# EAGLE board Flight Controller Auxiliary Board (EAGLE 8.6.0)
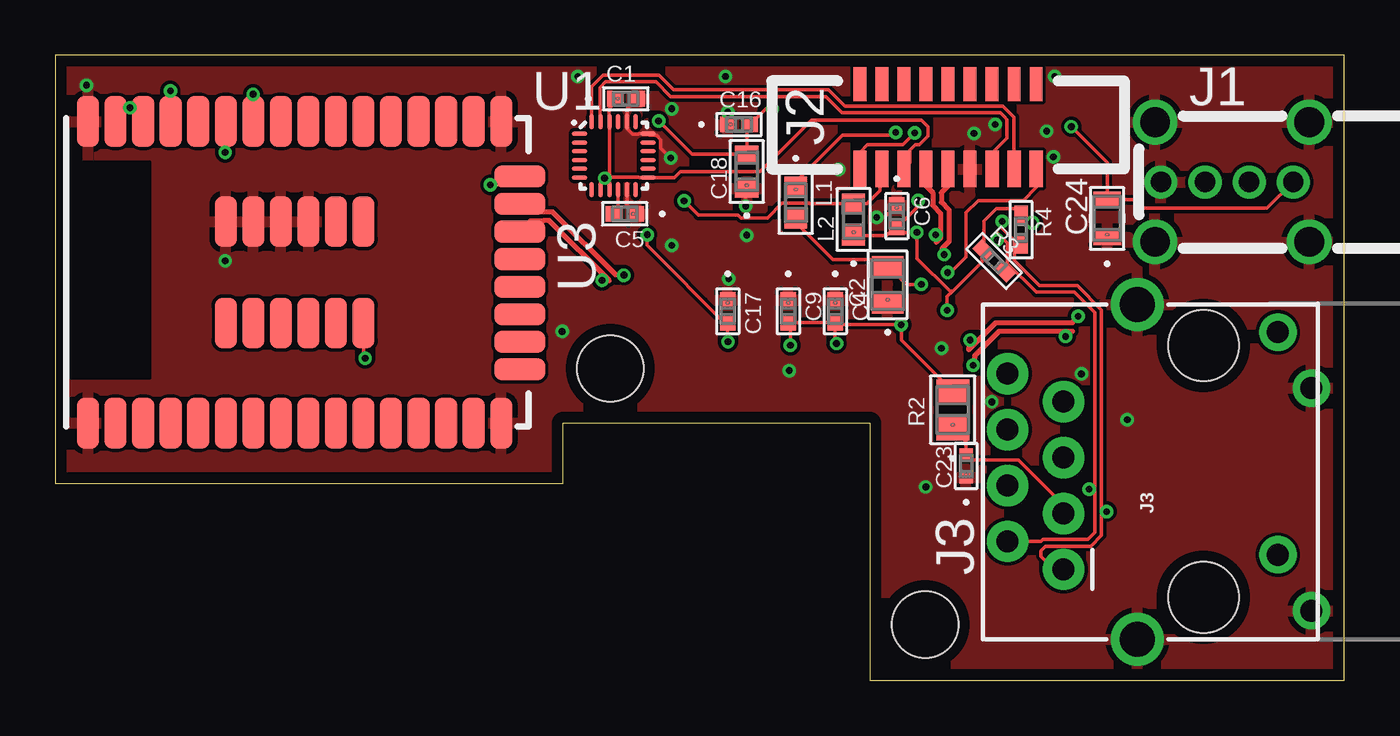
[diagram p0: board, top side]
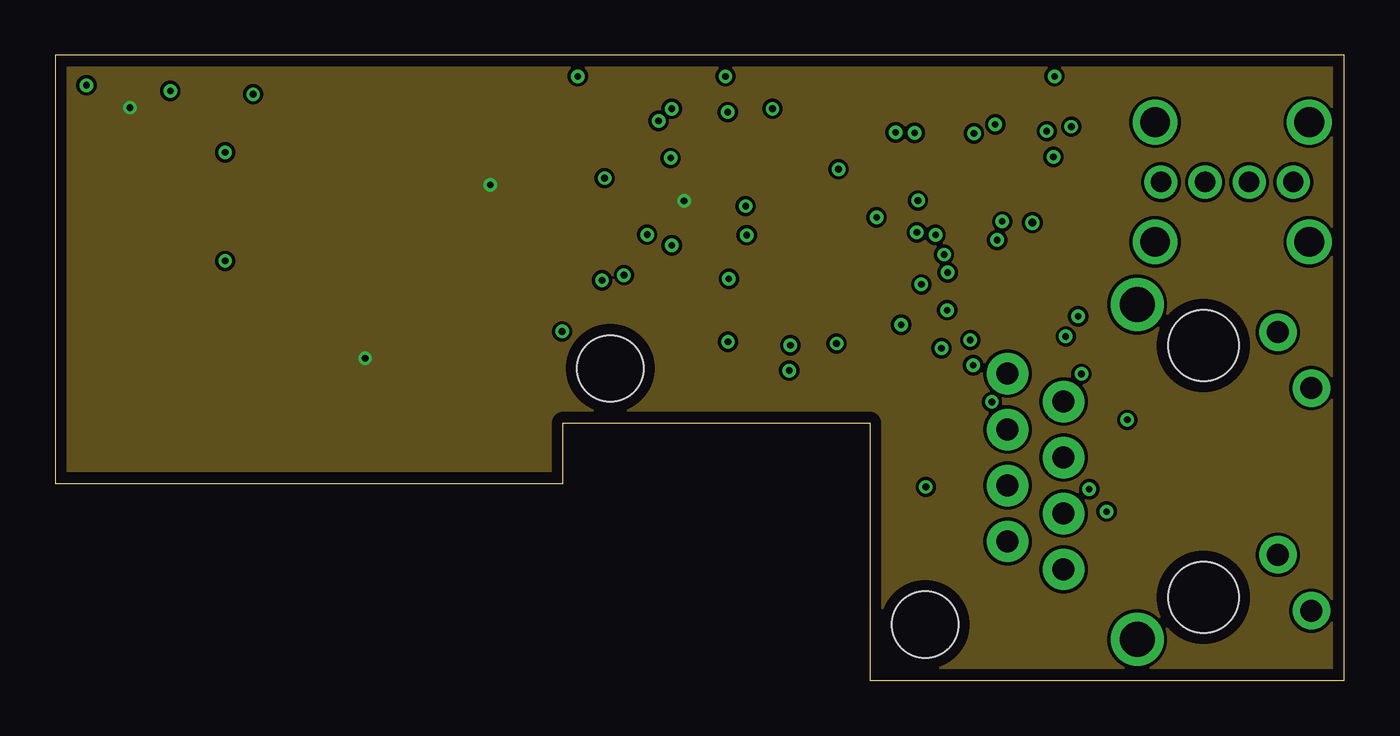
[diagram p1: board, inner layer Route2]
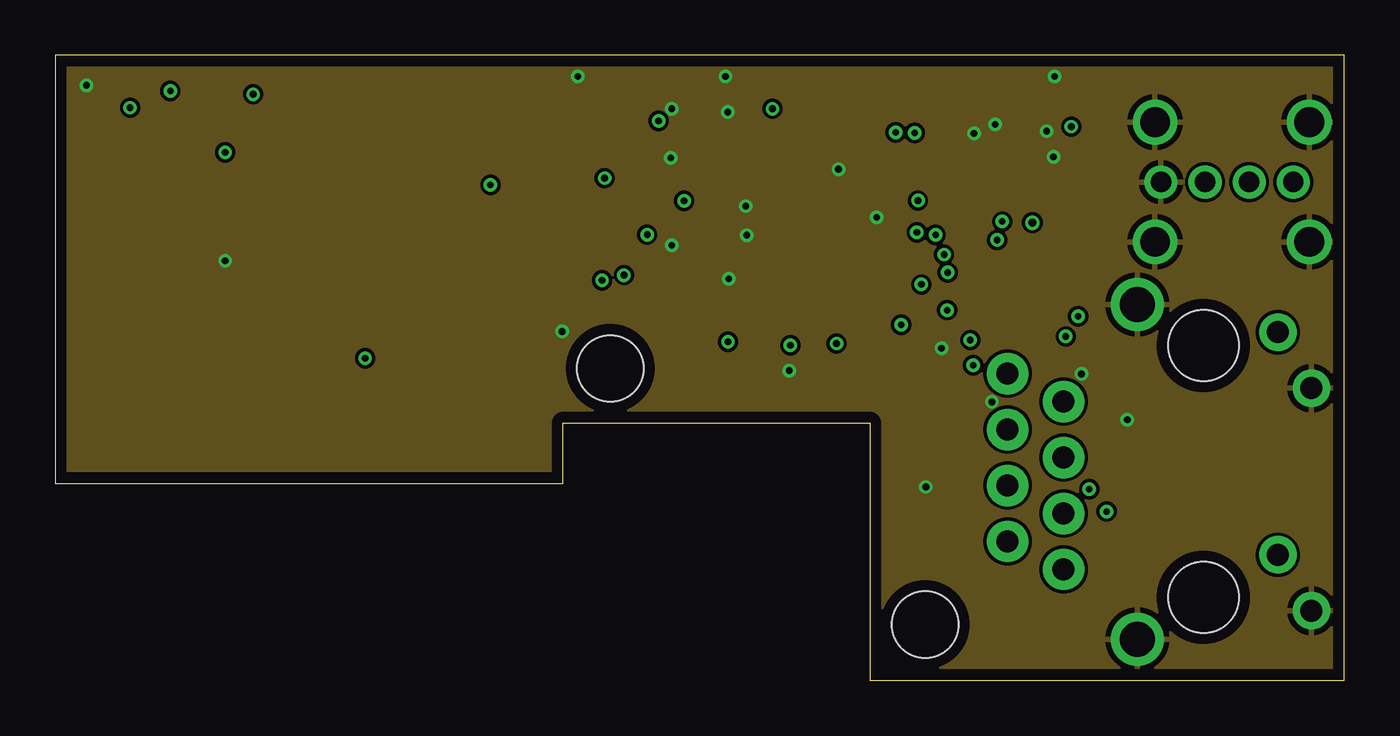
[diagram p2: board, inner layer Route15]
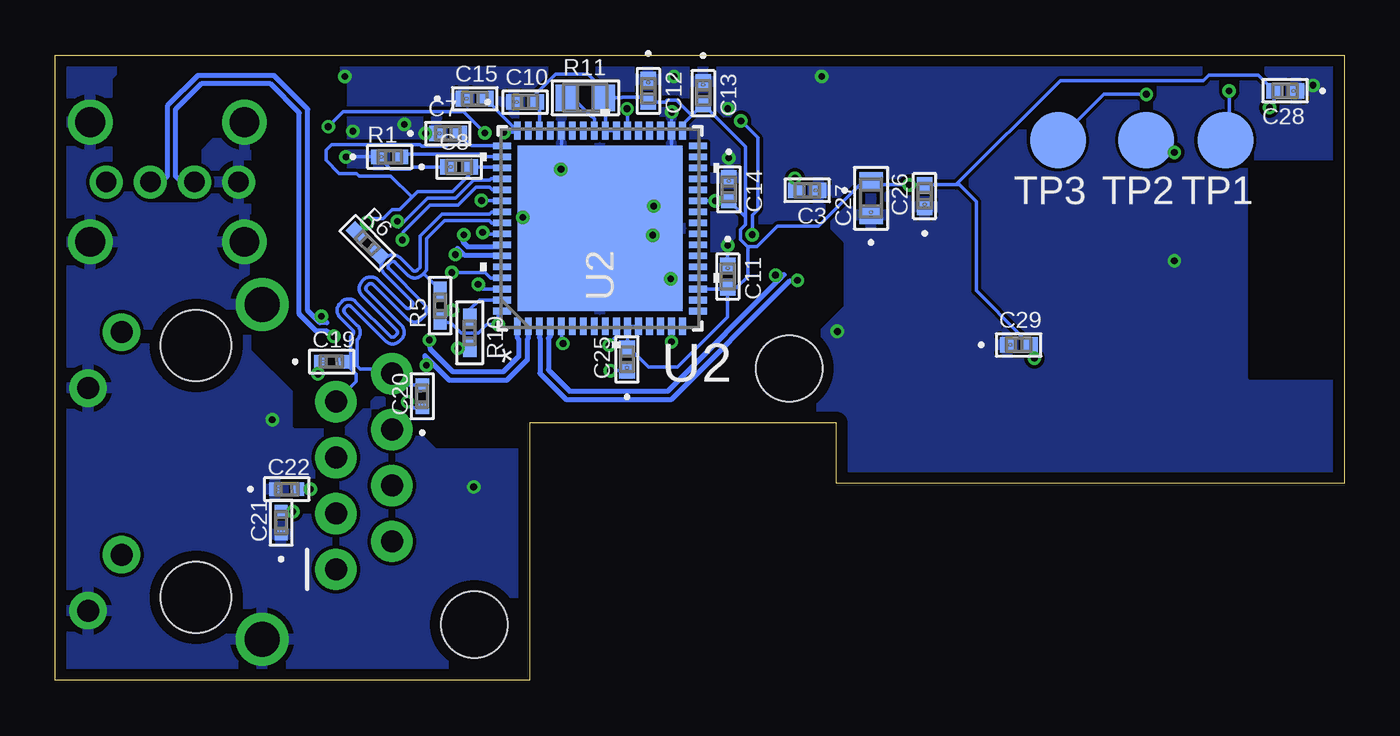
[diagram p3: board, bottom side, seen from below]

Size 58.52 x 28.4 mm. Coordinates in mm from the lower left corner, seen from the top.
Outline: 0,8.94 23.06,8.94 23.06,11.68 36.98,11.68 36.98,0 58.52,0 58.52,28.4 0,28.4 0,8.94
Copper layers (1*2*15*16): Top 0.035mm / dielectric 0.2mm / Route2 0.0175mm / dielectric 1.2mm / Route15 0.0175mm / dielectric 0.2mm / Bottom 0.035mm
Design rules "Elecrow_4-layer_PCB_eagle_rule *": minimum track width 6mil, minimum drill 12mil, track to track 6mil, track to pad 6mil, pad to pad 6mil, via to via 8mil, smd to smd 0mil, copper to edge 20mil, drill to drill 10mil, minimum pad ring 6mil, minimum via ring 6mil, stop-mask expansion 0mil, vias tented up to drill 100mil, thermal gap 10mil
Holes 3 mm at 39.5,2.53 25.19,14.17
tRestrict: area -0.1,13.7 to 4.3,23.5
bRestrict: area -0.1,13.7 to 4.3,23.5

## Footprints (pad centres in the part's own frame; a part is rotated, then mirrored left to right if it is on the bottom)
0402-M = smd 0.711 x 0.711: 1 -0.508,0; 2 0.508,0
YAG_CC0805 = smd 0.965 x 1.448: 1 -0.826,0; 2 0.826,0
0603-M = smd 0.813 x 1.067: 1 -0.775,0; 2 0.775,0
G-155-M = smd 0.559 x 0.61: 1 -0.521,0; 2 0.521,0
G-21 = smd 0.711 x 1.245: 1 -0.851,0; 2 0.851,0
USB_A_VERTICAL = drill 0.92 pad 1.5: 1 -3,0; 2 -1,0; 3 1,0; 4 3,0 | drill 1.35 pad 2: P$5 -3.73,-2.72; P$6 -3.73,2.72; P$7 3.27,2.72; P$8 3.27,-2.72
9POS_FFC_CONNECTOR = smd 0.6 x 1.65: 1 -7.27,-2; 2 -6.27,-2; 3 -5.27,-2; 4 -4.27,-2; 5 -3.27,-2; 6 -2.27,-2; 7 -1.27,-2; 8 -0.27,-2; 9 0.73,-2 | smd 0.584 x 1.524: P$16 -7.27,1.852; P$17 -6.27,1.852; P$18 -5.27,1.852; P$19 -4.27,1.852; P$20 -3.27,1.852; P$21 -2.27,1.852; P$22 -1.27,1.852; P$23 -0.27,1.852; P$24 0.73,1.852
MAGJACK = drill 1 pad 1.88: 1 -4.445,6.015; 2 -3.175,8.555; 3 -1.905,6.015; 4 -0.635,8.555; 5 0.635,6.015; 6 1.905,8.555; 7 3.175,6.015; 8 4.445,8.555 | drill 1 pad 1.7: 9 -3.785,-3.715; 10 -6.325,-5.235; 11 6.325,-3.715; 12 3.785,-5.235 | drill 1.6 pad 2.184: M1 -7.62,2.67; M2 7.58,2.67 | hole 3.2: -5.715,-0.335; 5.715,-0.335
IND_BLM18_0603-M = smd 0.914 x 1.041: 1 -0.724,0; 2 0.724,0
YAG_R0402-M = smd 0.66 x 0.66: 1 -0.508,0; 2 0.508,0
STA_RNCP0805-M = smd 1.118 x 1.499: 1 -0.826,0; 2 0.826,0
RC0402N-M = smd 0.864 x 0.61: 1 -0.66,0; 2 0.66,0
RC0805N = smd 1.006 x 1.2: 1 -0.853,0; 2 0.853,0
B2,54 = smd 2.54 x 2.54: TP 0,0
QFN40P300X300X105-25N = smd 0.7 x 0.2: 1 -1.55,1; 2 -1.55,0.6; 3 -1.55,0.2; 4 -1.55,-0.2; 5 -1.55,-0.6; 6 -1.55,-1; 13 1.55,-1; 14 1.55,-0.6; 15 1.55,-0.2; 16 1.55,0.2; 17 1.55,0.6; 18 1.55,1 | smd 0.2 x 0.7: 7 -1,-1.55; 8 -0.6,-1.55; 9 -0.2,-1.55; 10 0.2,-1.55; 11 0.6,-1.55; 12 1,-1.55; 19 1,1.55; 20 0.6,1.55; 21 0.2,1.55; 22 -0.2,1.55; 23 -0.6,1.55; 24 -1,1.55
QFN64_9X9MC-M = smd 0.813 x 0.305: 1 -4.445,3.75; 2 -4.445,3.25; 3 -4.445,2.75; 4 -4.445,2.25; 5 -4.445,1.75; 6 -4.445,1.25; 7 -4.445,0.75; 8 -4.445,0.25; 9 -4.445,-0.25; 10 -4.445,-0.75; 11 -4.445,-1.25; 12 -4.445,-1.75; 13 -4.445,-2.25; 14 -4.445,-2.75; 15 -4.445,-3.25; 16 -4.445,-3.75; 33 4.445,-3.75; 34 4.445,-3.25; 35 4.445,-2.75; 36 4.445,-2.25; 37 4.445,-1.75; 38 4.445,-1.25; 39 4.445,-0.75; 40 4.445,-0.25; 41 4.445,0.25; 42 4.445,0.75; 43 4.445,1.25; 44 4.445,1.75; 45 4.445,2.25; 46 4.445,2.75; 47 4.445,3.25; 48 4.445,3.75 | smd 0.305 x 0.813: 17 -3.75,-4.445; 18 -3.25,-4.445; 19 -2.75,-4.445; 20 -2.25,-4.445; 21 -1.75,-4.445; 22 -1.25,-4.445; 23 -0.75,-4.445; 24 -0.25,-4.445; 25 0.25,-4.445; 26 0.75,-4.445; 27 1.25,-4.445; 28 1.75,-4.445; 29 2.25,-4.445; 30 2.75,-4.445; 31 3.25,-4.445; 32 3.75,-4.445; 49 3.75,4.445; 50 3.25,4.445; 51 2.75,4.445; 52 2.25,4.445; 53 1.75,4.445; 54 1.25,4.445; 55 0.75,4.445; 56 0.25,4.445; 57 -0.25,4.445; 58 -0.75,4.445; 59 -1.25,4.445; 60 -1.75,4.445; 61 -2.25,4.445; 62 -2.75,4.445; 63 -3.25,4.445; 64 -3.75,4.445 | smd 7.493 x 7.493: 65 0,0
WGM110A = smd 2.3 x 1: 1 -6.85,0; 2 -6.85,-1.25; 3 -6.85,-2.5; 4 -6.85,-3.75; 5 -6.85,-5; 6 -6.85,-6.25; 7 -6.85,-7.5; 8 -6.85,-8.75; 9 -6.85,-10; 10 -6.85,-11.25; 11 -6.85,-12.5; 12 -6.85,-13.75; 13 -6.85,-15; 14 -6.85,-16.25; 15 -6.85,-17.5; 16 -6.85,-18.75; 25 6.85,-18.75; 26 6.85,-17.5; 27 6.85,-16.25; 28 6.85,-15; 29 6.85,-13.75; 30 6.85,-12.5; 31 6.85,-11.25; 32 6.85,-10; 33 6.85,-8.75; 34 6.85,-7.5; 35 6.85,-6.25; 36 6.85,-5; 37 6.85,-3.75; 38 6.85,-2.5; 39 6.85,-1.25; 40 6.85,0; 41 -2.3,-6.25; 42 2.3,-6.25; 43 -2.3,-7.5; 44 2.3,-7.5; 45 -2.3,-8.75; 46 2.3,-8.75; 47 -2.3,-10; 48 2.3,-10; 49 -2.3,-11.25; 50 2.3,-11.25; 51 -2.3,-12.5; 52 2.3,-12.5 | smd 1 x 2.3: 17 -4.4,-19.6; 18 -3.15,-19.6; 19 -1.9,-19.6; 20 -0.65,-19.6; 21 0.6,-19.6; 22 1.85,-19.6; 23 3.1,-19.6; 24 4.35,-19.6

## Placement (x,y rotation side)
C1  0.1uF  [0402-M]  25.91,26.42 0 top
C2  1uF  [YAG_CC0805]  37.79,17.97 90 top
C3  0.1uF  [0402-M]  24.38,22.25 180 bottom
C4  0.1uF  [0402-M]  35.41,16.76 270 top
C5  0.1uF  [0402-M]  25.86,21.18 180 top
C6  0.1uF  [0402-M]  38.2,21.08 270 top
C7  0.1uF  [0402-M]  40.69,24.84 0 bottom
C8  0.1uF  [0402-M]  40.18,23.32 0 bottom
C9  0.1uF  [0402-M]  33.27,16.76 270 top
C10  0.1uF  [0402-M]  37.19,26.26 0 bottom
C11  0.1uF  [0402-M]  27.99,18.34 270 bottom
C12  0.1uF  [0402-M]  31.6,26.77 270 bottom
C13  0.1uF  [0402-M]  29.11,26.67 270 bottom
C14  0.1uF  [0402-M]  27.94,22.3 270 bottom
C15  0.1uF  [0402-M]  39.47,26.42 0 bottom
C16  0.1uF  [0402-M]  31.04,25.25 0 top
C17  0.1uF  [0402-M]  30.53,16.76 270 top
C18  4.7uF  [0603-M]  31.39,23.11 90 top
C19  16pF  [G-155-M]  45.97,14.48 0 bottom
C20  16pF  [G-155-M]  41.86,12.9 90 bottom
C21  16pF  [G-155-M]  48.26,7.16 90 bottom
C22  16pF  [G-155-M]  48.01,8.69 0 bottom
C23  22nF  [G-155-M]  41.35,9.74 90 top
C24  22uF  [G-21]  47.75,20.98 90 top
C25  0.1uF  [0402-M]  32.56,14.58 90 bottom
C26  0.1uF  [0402-M]  19.05,22 90 bottom
C27  4.7uF  [0603-M]  21.49,21.89 90 bottom
C28  0.1uF  [0402-M]  2.69,26.77 180 bottom
C29  0.1uF  [0402-M]  14.78,15.24 0 bottom
J1  [USB_A_VERTICAL]  53.2,22.63 180 top
J2  [9POS_FFC_CONNECTOR]  43.8,25.22 0 top
J3  MAGJACK  [MAGJACK]  51.79,9.49 90 top
L1  FB  [IND_BLM18_0603-M]  33.62,21.71 270 top
L2  FB  [IND_BLM18_0603-M]  36.24,20.94 90 top
R1  12.4k  [YAG_R0402-M]  43.33,23.77 0 bottom
R2  10R  [STA_RNCP0805-M]  40.74,12.29 90 top
R3  49R9  [RC0402N-M]  42.62,19.05 315 top
R4  49R9  [RC0402N-M]  43.84,20.47 270 top
R5  49R9  [RC0402N-M]  41.05,17.02 90 bottom
R6  49R9  [RC0402N-M]  44.35,19.86 315 bottom
R10  12k  [RC0402N-M]  39.7,15.79 270 bottom
R11  10k  [RC0805N]  34.45,26.46 0 bottom
TP1  TPB2,54  [B2,54]  5.4,24.53 180 bottom
TP2  TPB2,54  [B2,54]  9,24.53 180 bottom
TP3  TPB2,54  [B2,54]  13,24.53 180 bottom
U1  [QFN40P300X300X105-25N]  25.36,23.83 0 top
U2  [QFN64_9X9MC-M]  33.79,20.53 90 bottom
U3  WGM110A  [WGM110A]  1.5,18.53 90 top

## Library data of the parts
C1 C3-C17 C25 C26 C28 C29 = 0.1uF-capacitor-0402; MANUFACTURER_PART_NUMBER: 0402ZD104KAT2A; VENDOR: AVX Corporation
C2 = 1uF X7R Ceramic Capacitor; COPYRIGHT: Copyright C 2015 Accelerated Designs. All rights reserved; MANUFACTURER_PART_NUMBER: CC0805KKX7R7BB105; VENDOR: Vendor
C18 C27 = 4.7uF-capacitor; MANUFACTURER_PART_NUMBER: 06036D475KAT2A; VENDOR: AVX Corporation
C19-C22 = 16pF-capacitor; MANUFACTURER_PART_NUMBER: GRM1555C1H160JA01D; VENDOR: Murata
C23 = 22nF-capacitor; MANUFACTURER_PART_NUMBER: GRM155R71H223KA12D; VENDOR: Murata
C24 = 22uF X5R Ceramic Capacitor; COPYRIGHT: Copyright C 2015 Accelerated Designs. All rights reserved; MANUFACTURER_PART_NUMBER: GRM21BR60J226ME39L; VENDOR: Vendor
J1 J2 U3 = thanics_robotics
J3 = SparkFun-Connectors; PROD_ID: CONN-09556; SF_ID: PRT-08534
L1 L2 = 600ohm-fb; MANUFACTURER_PART_NUMBER: BLM18AG601SN1D; VENDOR: MURATA
R1 = 12.4k-resistor; MANUFACTURER_PART_NUMBER: RC0402FR0712K4L; VENDOR: Yageo
R2 = 10-resistor; COPYRIGHT: Copyright C 2015 Accelerated Designs. All rights reserved; MANUFACTURER_PART_NUMBER: RNCP0805FTD10R0; VENDOR: Vendor
R3-R6 = 49.9-resistor; MANUFACTURER_PART_NUMBER: RC0402FR0749K9L; VENDOR: Yageo
R10 = 12k-resistor; MANUFACTURER_PART_NUMBER: RC0402FR0712KL; VENDOR: Yageo
R11 = 10k-resistor; CASE: 0805 2012 metric; COMPOSITION: Thin Film; COPYRIGHT: Copyright C 2015 Accelerated Designs. All rights reserved; DATASHEET: httpindustrial.panasonic.comwwwcgijvcr13pz.cgi?E+PZ+3+AOA0026+ERA6AEB103V+7+WW; DIGIKEYPARTNUMBER: P10KDATRND; HEIGHT: 0.024" 0.60mm; LEADSTYLE: Surface Mount SMD SMT; MANUFACTURER_PART_NUMBER: ERA6AEB103V; NUMBEROFTERMINATIONS: 2; PACKAGECASE: 0805 2012 Metric; PACKAGING: Tape &amp Reel TR; POWERWATTS: 0.125W 18W; QUANTITY_AVAILABLE: 225000; RESISTANCEINOHMS: 10.0K; RESISTANCEOHMS: 10K; SIZEDIMENSION: 0.079" L x 0.049" W 2.00mm x 1.25mm; TEMPERATURECOEFFICIENT: 25ppm°C; TOLERANCE: 0.1%; VENDOR: Panasonic; VOLTAGEWORKING: 100V
TP1-TP3 = testpad
U1 = ICM-20948-mpu
U2 = lan9512; MANUFACTURER_PART_NUMBER: LAN9512JZX; VENDOR: MICROCHIP

## Nets
1.8V: C1.1 C3.2 J2.3 U1.8 U1.9 U1.13 U1.22
3.3V_A: C4.2 C6.2 C7.2 C8.2 C9.2 L2.1 R2.2 R3.1 R4.1 R5.1 R6.1 U2.5 U2.10 U2.49 U2.51 U2.54 U2.57 U2.64
+3V3: C10.2 C11.2 C12.2 C13.2 C14.2 C25.2 C26.2 C27.2 C28.2 C29.2 J2.2 L2.2 R11.2 U2.11 U2.12 U2.19 U2.27 U2.33 U2.39 U2.40 U2.46 U3.24 U3.38 U3.39 U3.51
+5V: C24.2 J1.1 J2.1
GND: C1.2 C2.1 C3.1 C4.1 C5.1 C6.1 C7.1 C8.1 C9.1 C10.1 C11.1 C12.1 C13.1 C14.1 C15.1 C16.1 C17.1 C18.1 C19.1 C20.1 C21.1 C22.1 C23.1 C24.1 C25.1 C26.1 C27.1 C28.1 C29.1 J1.4 J1.P$5 J1.P$6 J1.P$7 J1.P$8 J2.6 J3.10 J3.12 J3.M1 J3.M2 R1.1 R10.2 U1.11 U1.18 U1.20 U2.34 U2.44 U2.65 U3.1 U3.16 U3.25 U3.40 U3.42 U3.44 U3.46 U3.48
GPCLK: J2.9 U2.61
N$1: R11.1 U2.41
N$2: R10.1 U2.63
N$3: C15.2 L1.1 U2.48
N$4: C2.2 L1.2 U2.62
N$7: TP1.TP U3.37
N$8: TP2.TP U3.35
N$9: TP3.TP U3.34
N$10: J3.11
N$11: C5.2 U1.10
N$12: J3.9
N$14: R1.2 U2.50
N$15: C16.2 C17.2 C18.2 U2.15 U2.38
N$16: C23.2 J3.3 R2.1
RX_N: C22.2 J3.2 R3.2 U2.53
RX_P: C21.2 J3.1 R4.2 U2.52
SCL: J2.7 U1.23
SDA: J2.8 U1.24
TX_N: C20.2 J3.8 R5.2 U2.56
TX_P: C19.2 J3.7 R6.2 U2.55
USB_D2_N: J1.2 U2.1
USB_D2_P: J1.3 U2.2
USB_D3_N: U2.3 U3.22
USB_D3_P: U2.4 U3.23
USB_D_N: J2.4 U2.58
USB_D_P: J2.5 U2.59

## Tracks (layer width: path | path; a pad name or v marks a point on that pad's centre or on a via)
1.8V  (via drill 0.3)
  Top 0.152: v24.94,22.81 24.76,22.62 U1.8 | U1.9 25.16,22.6 v24.94,22.81 | 25.15,22.86 26.49,22.86 26.52,22.83 U1.13 28.11,22.83 28.4,23.11 32,23.11 34.34,25.45 39.32,25.45 39.62,25.15 39.62,24.72 39.24,24.33 39.06,24.33 38.81,24.08 38.81,23.51 J2.3 | 25.15,22.86 24.99,22.86 v24.94,22.81 | C1.1 25.4,26.21 25.15,25.96 25.15,25.39 U1.22 25.16,22.87 25.15,22.86
  Bottom 0.152: C3.2 24.94,22.3 v24.94,22.81
3.3V_A  (via drill 0.3, 0.35)
  Top 0.152: C6.2 38.2,20.68 37.73,20.21 L2.1 | C6.2 38.48,20.35 v39.12,20.35 39.12,19.17 40.61,17.68 40.74,17.68 | C4.2 35.51,16.15 v38.4,16.15 38.4,15.46 R2.2 | C4.2 C9.2 33.38,16.15 v33.38,15.22 | C6.2 38.63,21.01 38.65,21.01 39.17,21.52 v39.17,21.79 | v40.49,16.82 40.49,17.42 40.74,17.68 | 40.74,17.68 42.06,19 42.06,19.52 R3.1 42.15,20.85 42.72,21.42 43.56,21.42 R4.1 44.01,21.13 v44.36,20.79 | C4.2 35.41,15.36 v35.47,15.3
  Bottom 0.152: U2.51 38.28,23.32 C8.2 39.75,23.24 39.75,22.92 40.47,22.2 42.06,22.2 42.32,21.94 | U2.54 39.15,21.78 v39.17,21.79 | U2.57 39.05,20.28 v39.12,20.35 | U2.64 38.4,16.61 v38.4,16.15 38.94,16.15 39.3,15.79 40.1,15.79 40.52,16.21 R5.1 40.94,16.36 v40.49,16.82 | 42.32,21.94 42.89,21.38 43.21,21.38 43.63,20.96 44.18,20.96 v44.36,20.79 R6.1 | v33.38,15.22 33.15,15.45 33.15,15.54 33.04,15.64 U2.10 | U2.49 39.62,24.28 39.67,24.33 | 39.67,24.33 C7.2 | 39.67,24.33 40.67,24.33 40.75,24.26 41.88,24.26 41.95,24.33 45.97,24.33 46.23,24.08 46.23,23.62 45.62,23.01 44.83,23.01 44.73,22.91 43.29,22.91 42.32,21.94 | U2.5 35.54,15.38 v35.47,15.3
+3V3  (via drill 0.3)
  Top 0.152: J2.2 37.44,23.14 37.44,22.25 36.85,21.66 L2.2 34.24,21.66 34.23,21.67 33,21.67 32.34,21.01 31.12,21.01 31,21.13 29.2,21.13 v28.55,21.78 | U3.24 20.72,22.5 v19.76,22.5 | U3.51 14,14.7 v14.07,14.63 | U3.39 3.37,26.01 v3.4,26.01 3.4,25.98 U3.38
  Bottom 0.152: U2.19 28.04,17.78 C11.2 | U2.33 30.04,25.23 29.59,25.68 | 29.59,25.68 C13.2 27.18,24.23 27.18,21.03 | U2.39 U2.40 33.54,26.4 R11.2 33.53,26.46 | 29.59,25.68 29.65,25.68 30.31,26.34 30.75,26.34 30.83,26.26 C12.2 31.83,26.49 32.78,26.49 32.82,26.46 33.53,26.46 | U2.27 v28.55,21.78 27.96,21.78 C14.2 27.18,21.03 | C11.2 27.58,17.83 27.08,18.34 27.08,19.71 | C11.2 27.99,16.51 30.28,14.22 31.59,14.22 32.56,15.19 C25.2 32.51,16.05 U2.11 U2.12 | U2.46 36.54,26.13 C10.2 36.68,26.67 35.81,27.53 34.34,27.53 33.78,26.98 33.78,26.71 33.53,26.46 | v14.07,14.63 14.07,15.04 C29.2 14.71,15.67 14.71,15.69 16.71,17.7 16.71,21.74 17.48,22.5 17.63,22.5 | v3.4,26.01 3.2,26.21 C28.2 3.91,27.48 6.15,27.48 6.4,27.23 12.9,27.23 17.63,22.5 | 17.63,22.5 C26.2 v19.76,22.5 21.32,22.5 C27.2 21.83,22.67 23.88,20.63 25.74,20.63 26.65,19.71 27.08,19.71 | 27.18,21.03 27.18,20.69 27.41,20.47 27.41,20.02 27.09,19.71 27.08,19.71
  pour Route2: 0.05,28.3 58.57,28.3 58.57,0.1 0.05,0.1
+5V  (via drill 0.3)
  Top 0.152: J2.1 36.53,23.98 36.88,24.33 | 36.88,24.33 | 36.88,24.33 38.48,24.33 v39.01,24.86 | v46.13,25.15 47.75,23.52 C24.2 48.98,21.83 49.38,21.44 55,21.44 J1.1
  Bottom 0.152: v39.01,24.86 39.98,25.83 45.44,25.83 v46.13,25.15
GND  (via drill 0.3)
  Top 0.152: C6.1 37.77,21.16 37.75,21.16 37.62,21.03 v37.29,21.03 | U1.11 25.96,21.59 C5.1 | C1.2 25.98,25.98 25.98,25.97 25.96,25.94 U1.20 25.96,25.07 26.22,24.8 26.49,24.8 26.52,24.83 U1.18 26.98,24.76 27.29,24.76 27.49,24.57 27.49,24.18 v27.94,23.72 | C18.1 31.34,22.29 v31.34,21.54
  Bottom 0.152: U2.65 35.54,22.28 U2.44 | U2.65 30.54,23.78 U2.34 30.54,25.8 v30.53,25.81 | U2.65 32.36,20.53 v31.34,21.54 | C7.1 v41.71,24.84 | v40.23,15.09 40.19,15.13 R10.2 | v42.52,12.65 42.25,12.38 C20.1 | C19.1 46.49,13.92 v46.58,13.92 | C11.1 v27.99,19.76 | C25.1 v33.32,14.07 | C8.1 42.3,23.32 42.4,23.22 43.28,23.22 R1.1 v45.31,23.77
  other vias: 30.43,27.43 23.72,27.43 45.01,24.94 1.42,27.03 7.72,19.05 30.58,18.24 27.99,25.96 31.39,20.22 42.67,25.25 45.36,27.43 39.52,8.79 48.67,11.84 23.01,15.85 35.56,23.22
  pour Top: -2.5,28.39 58.5,28.39 58.5,0.03 -2.5,0.03
  pour Bottom (rank 2): -2.5,28.39 58.5,28.39 58.5,0.03 -2.5,0.03
  pour Route15: 0.05,28.35 0.05,0.05 58.57,0.05 58.57,28.35
GPCLK  (via drill 0.3)
  Top 0.152: 41.35,20.18 | 41.35,20.18 41.35,21.23 41.91,21.79 43.94,21.79 44.53,22.38 J2.9 | 41.35,20.18 41.35,19.23 40.65,18.53 v40.51,18.53
  Bottom 0.152: U2.61 38.76,18.28 39,18.52 40.02,18.52 40.03,18.53 v40.51,18.53
N$1
  Bottom 0.152: R11.1 35.02,26.46 34.2,25.63 34.16,25.63 34.04,25.5 U2.41
N$2
  Bottom 0.152: U2.63 39.26,17.28 39.7,16.84 R10.1
N$3  (via drill 0.3)
  Top 0.152: L1.1 33.62,22.65 35.74,24.77 38.03,24.77 v38.15,24.89
  Bottom 0.152: C15.2 38.43,25.86 U2.48 37.63,24.89 v38.15,24.89
N$4  (via drill 0.3)
  Top 0.152: v39.32,17.98 38.66,17.98 C2.2 37.48,19.1 35.31,19.1 33.62,20.79 L1.2
  Bottom 0.152: U2.62 39.11,17.78 v39.32,17.98
N$5
  cutout Bottom: 34.65,16.05 31.55,16.05 28.04,19.56 26.97,20.62 25.81,20.62 23.57,20.62 22.81,19.86 22.81,17.02 23.62,16.21 29.21,10.62 36.32,10.62 41.2,10.62 43.79,13.21 45.47,11.53 47.65,11.53 47.65,13.16 49.53,15.04 49.53,24.69 49.73,24.89 51.21,24.89 51.46,24.64 51.97,24.13 51.97,22.1 52.27,21.79 54.15,21.79 55.83,23.47 55.83,25.81 55.83,27.28 54,29.11 47.29,29.11 45.52,27.33 45.36,27.18 45.36,21.29 42.47,24.18 37.59,24.18 34.65,21.23
N$7  (via drill 0.3)
  Top 0.152: U3.37 5.25,26.76 v5.23,26.77
  Bottom 0.152: v5.23,26.77 5.23,24.7 TP1.TP
N$8  (via drill 0.3)
  Top 0.152: v7.72,23.98 7.72,25.36 U3.35
  Bottom 0.152: TP2.TP 8.28,24.53 v7.72,23.98
N$9  (via drill 0.3)
  Top 0.152: v8.99,26.62 v9,26.61 U3.34
  Bottom 0.152: TP3.TP 10.91,26.62 v8.99,26.62
N$11
  Top 0.152: U1.10 25.56,21.39 C5.2
N$14
  Bottom 0.152: U2.50 39.1,23.78 39.22,23.9 42.7,23.9 R1.2
N$15  (via drill 0.3)
  Top 0.152: v32.56,25.96 32.26,25.96 C16.2 31.39,25.1 C18.2 28.91,23.89 v27.39,25.41 | 30.53,16.1 C17.2 | 30.53,16.1 30.53,15.39 v30.54,15.38 | v26.87,20.24 26.87,19.76 30.53,16.1
  Bottom 0.152: U2.38 32.54,25.94 v32.56,25.96 | v30.54,15.38 U2.15 | v27.39,25.41 26.62,24.64 26.62,21.39 26.87,21.13 v26.87,20.24
N$16
  Top 0.152: R2.1 41.35,10.86 C23.2 41.59,10.02 43.72,10.02 45.77,7.97 J3.3
RX_N  (via drill 0.3)
  Top 0.152: v42.76,20 42.72,20.36 43.23,19.85 43.23,18.94 | 47.19,8.69 47.19,16.7 46.27,17.63 44.54,17.63 43.23,18.94 | 47.19,8.69 47.19,6.72 46.88,6.4 45.06,6.4 44.96,6.4 44.83,6.4 44.75,6.32 J3.2 | v46.94,8.69 47.19,8.69 | R3.2 43.09,18.79 43.23,18.94
  Bottom 0.152: U2.53 38.69,22.28 38.81,22.4 39.41,22.4 40.22,21.59 41.49,21.59 42.72,20.36 v42.76,20 | C22.2 v46.94,8.69
RX_P  (via drill 0.3)
  Top 0.152: v42.99,20.84 42.93,20.58 43.54,19.98 | 43.54,19.98 43.54,19.06 44.67,17.93 46.39,17.93 47.5,16.83 47.5,7.67 | 47.5,7.67 47.5,6.59 47,6.1 44.96,6.1 44.75,5.89 44.75,5.64 45.35,5.05 J3.1 | v47.73,7.67 47.5,7.67 | R4.2 43.7,19.81 43.54,19.98
  Bottom 0.152: U2.52 38.74,22.78 38.81,22.71 39.53,22.71 40.35,21.9 41.62,21.9 42.93,20.58 v42.99,20.84 | C21.2 47.74,7.68 v47.73,7.67
SCL
  Top 0.152: U1.23 24.74,25.4 24.74,26.92 24.99,27.18 27.28,27.18 27.94,26.52 34.98,26.52 35.72,25.78 42.9,25.78 43.08,25.6 43.21,25.47 43.21,24.62 42.53,23.94 J2.7
SDA
  Top 0.152: U1.24 24.36,26.97 24.87,27.48 27.41,27.48 28.07,26.82 35.11,26.82 35.84,26.09 43.03,26.09 43.53,25.58 J2.8
TX_N
  Bottom 0.152: U2.56 38.71,20.78 38.81,20.88 40.83,20.88 41.66,20.05 41.66,18.63 41.8,18.49 | 41.8,18.49 41.87,18.41 arc90 42.52,18.41 43.09,18.98 arc-90 43.3,18.98 43.37,18.91 arc-90 43.37,18.69 41.81,17.13 arc90 41.81,16.49 41.88,16.42 arc90 42.52,16.42 44.09,17.98 arc-90 44.3,17.98 44.37,17.91 arc-90 44.37,17.69 42.81,16.13 arc90 42.81,15.49 42.88,15.42 arc90 43.52,15.42 45.09,16.98 arc-90 45.3,16.98 45.37,16.91 arc-90 45.37,16.69 44.81,16.13 arc90 44.81,15.48 44.81,14.29 44.67,14.15 43.45,14.15 J3.8 42.72,13.42 C20.2 | R5.2 41.05,17.73 41.8,18.49
TX_P
  Bottom 0.152: U2.55 38.72,21.28 38.81,21.18 40.96,21.18 41.96,20.18 41.96,18.76 42.09,18.63 arc90 42.31,18.63 42.87,19.19 arc-90 43.52,19.19 43.59,19.13 | J3.7 44.86,13.58 44.86,13.91 45.11,14.16 45.11,14.53 | 43.59,19.13 arc-90 43.59,18.48 42.32,17.22 arc90 42.32,17 42.39,16.93 arc90 42.61,16.93 43.87,18.19 arc-90 44.52,18.19 44.59,18.13 arc-90 44.59,17.48 43.02,15.92 arc90 43.02,15.7 43.09,15.63 arc90 43.31,15.63 44.87,17.19 arc-90 45.52,17.19 45.59,17.13 arc-90 45.59,16.48 45.02,15.91 arc90 45.02,15.7 45.11,15.61 45.11,14.53 | C19.2 45.11,14.53 | 43.59,19.13 43.61,19.13 R6.2
USB_D2_N  (via drill 0.3)
  Top 0.229: v41.54,15.46 41.47,15.02 42.69,16.24 46.18,16.24 v46.43,16.54
  Bottom 0.229: U2.1 37.54,15.56 37.48,15.49 37.48,14.71 38.18,14.01 40.46,14.01 41.47,15.02 v41.54,15.46 | v46.43,16.54 46.18,16.24 46.5,16.24 47.05,16.79 47.05,25.94 48.59,27.47 52.05,27.47 53.43,26.09 53.43,22.91 53.71,22.63 J1.2
USB_D2_P  (via drill 0.3)
  Top 0.229: v41.67,14.31 41.74,14.75 42.85,15.86 46.18,15.86 v45.87,15.62
  Bottom 0.229: U2.2 37.04,15.55 37.1,15.49 37.1,14.55 38.02,13.63 40.62,13.63 41.74,14.75 v41.67,14.31 | v45.87,15.62 46.18,15.86 46.66,15.86 47.43,16.63 47.43,25.78 48.75,27.09 51.89,27.09 53.05,25.93 53.05,22.91 52.77,22.63 J1.3
USB_D3_N  (via drill 0.3)
  Top 0.229: v24.83,18.17 25.16,18.15 22.43,20.89 22.18,20.89 22.15,20.87 21.58,20.87 U3.22
  Bottom 0.229: U2.3 36.54,15.57 36.51,15.55 36.51,13.94 35.33,12.76 30.55,12.76 25.16,18.15 v24.83,18.17
USB_D3_P  (via drill 0.3)
  Top 0.229: v25.82,18.41 25.43,18.42 22.58,21.27 21.46,21.27 U3.23
  Bottom 0.229: U2.4 36.04,15.63 36.13,15.55 36.13,14.1 35.18,13.14 30.71,13.14 25.43,18.42 v25.82,18.41
USB_D_N  (via drill 0.3)
  Top 0.229: J2.4 39.53,22.46 39.84,22.15 39.84,21.56 40.2,21.21 40.2,20.09 40,19.9 v39.96,20.23
  Bottom 0.229: v39.96,20.23 40,19.9 39.8,19.7 38.32,19.7 U2.58
USB_D_P  (via drill 0.3)
  Top 0.229: J2.5 40.53,22.46 40.22,22.15 40.22,21.72 40.58,21.36 40.58,19.94 40.27,19.63 v40.35,19.34
  Bottom 0.229: v40.35,19.34 40.27,19.63 39.96,19.32 38.28,19.32 U2.59

## Text on the board
tPlace: U1 | J2 | J1 | U3 | J3
bPlace: U2